# EAGLE board ESP8266-Thing-Dev_Panel_v10 (EAGLE 7.4.0), part 1 of 7
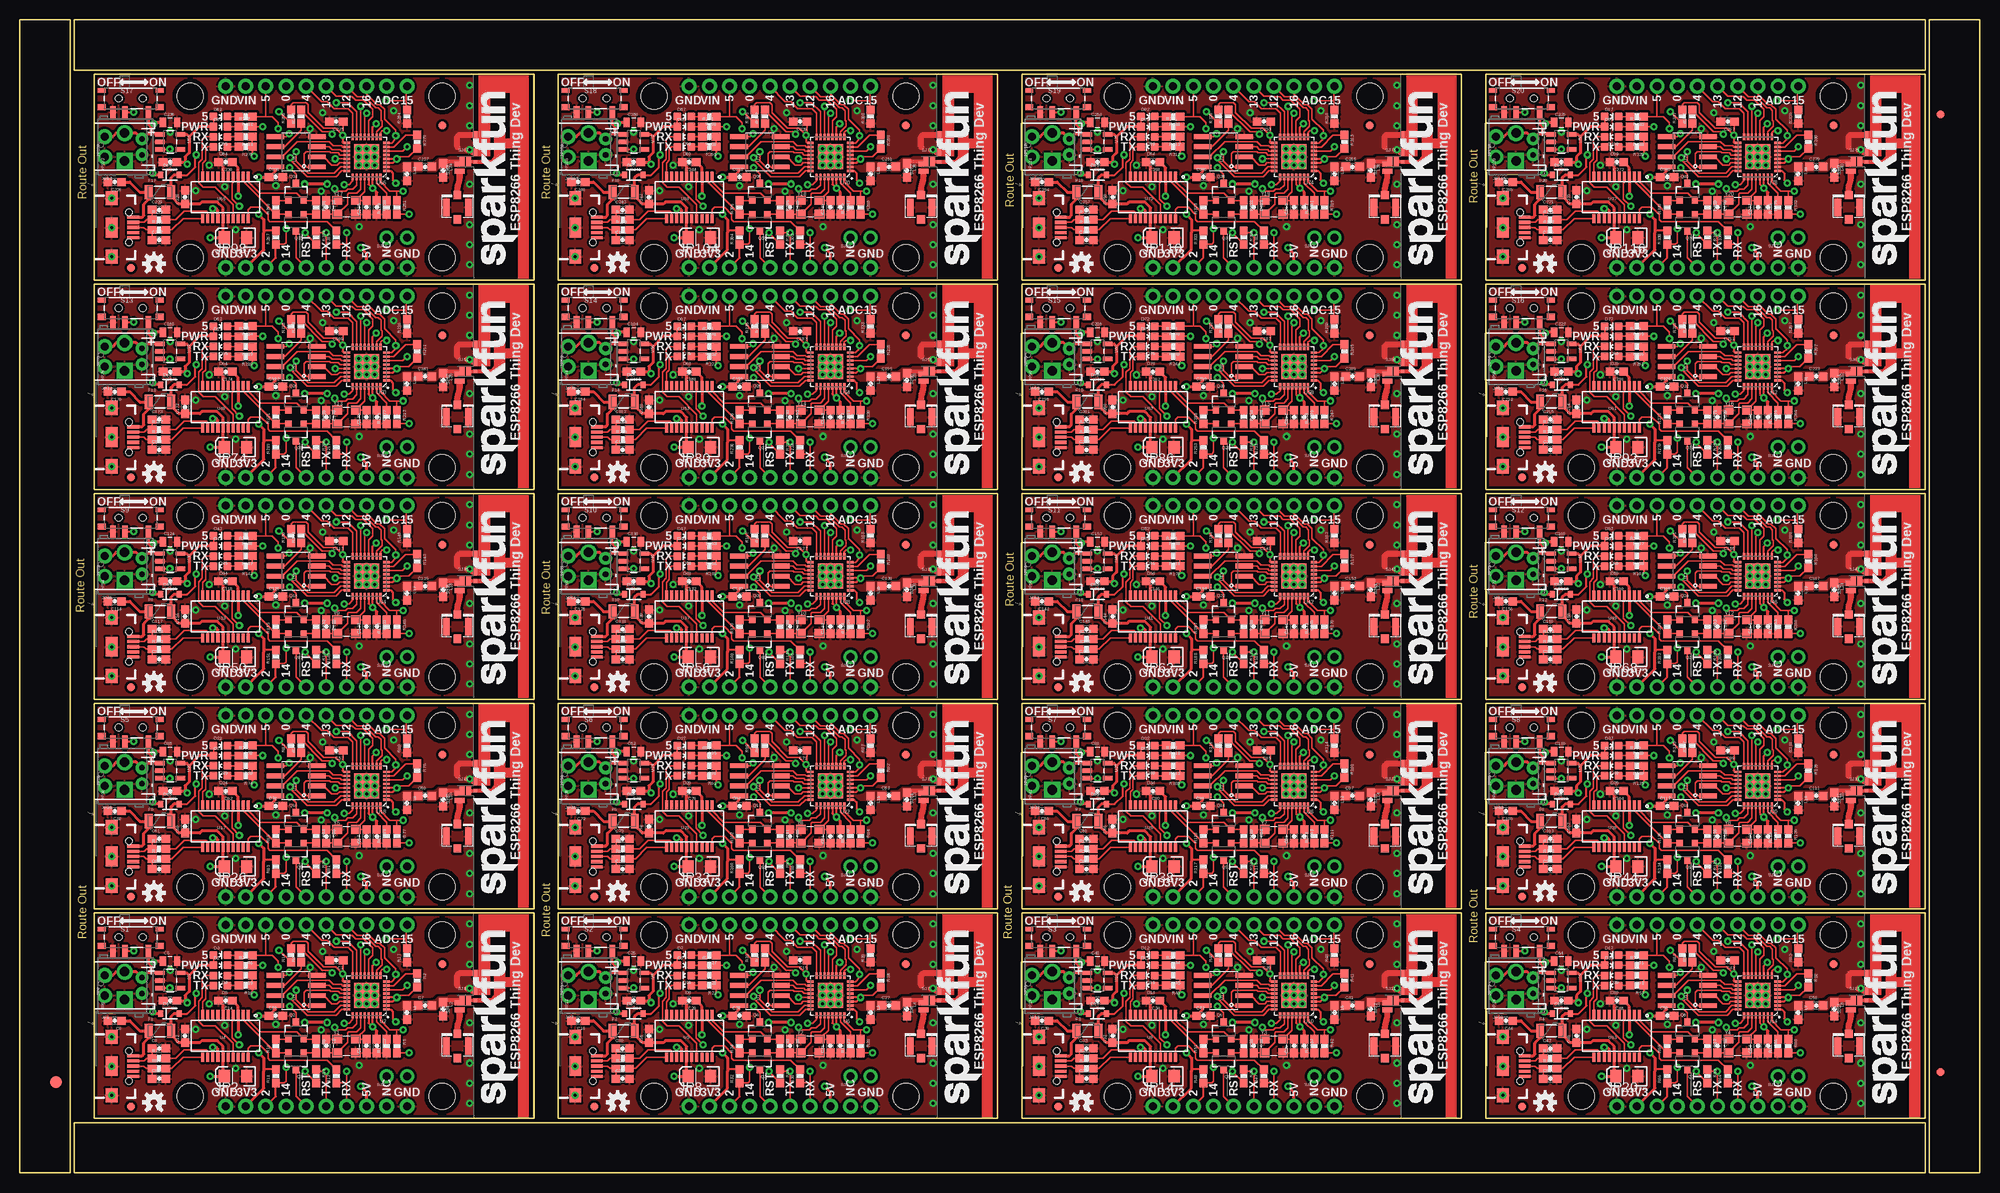
[diagram p0: board, top side]
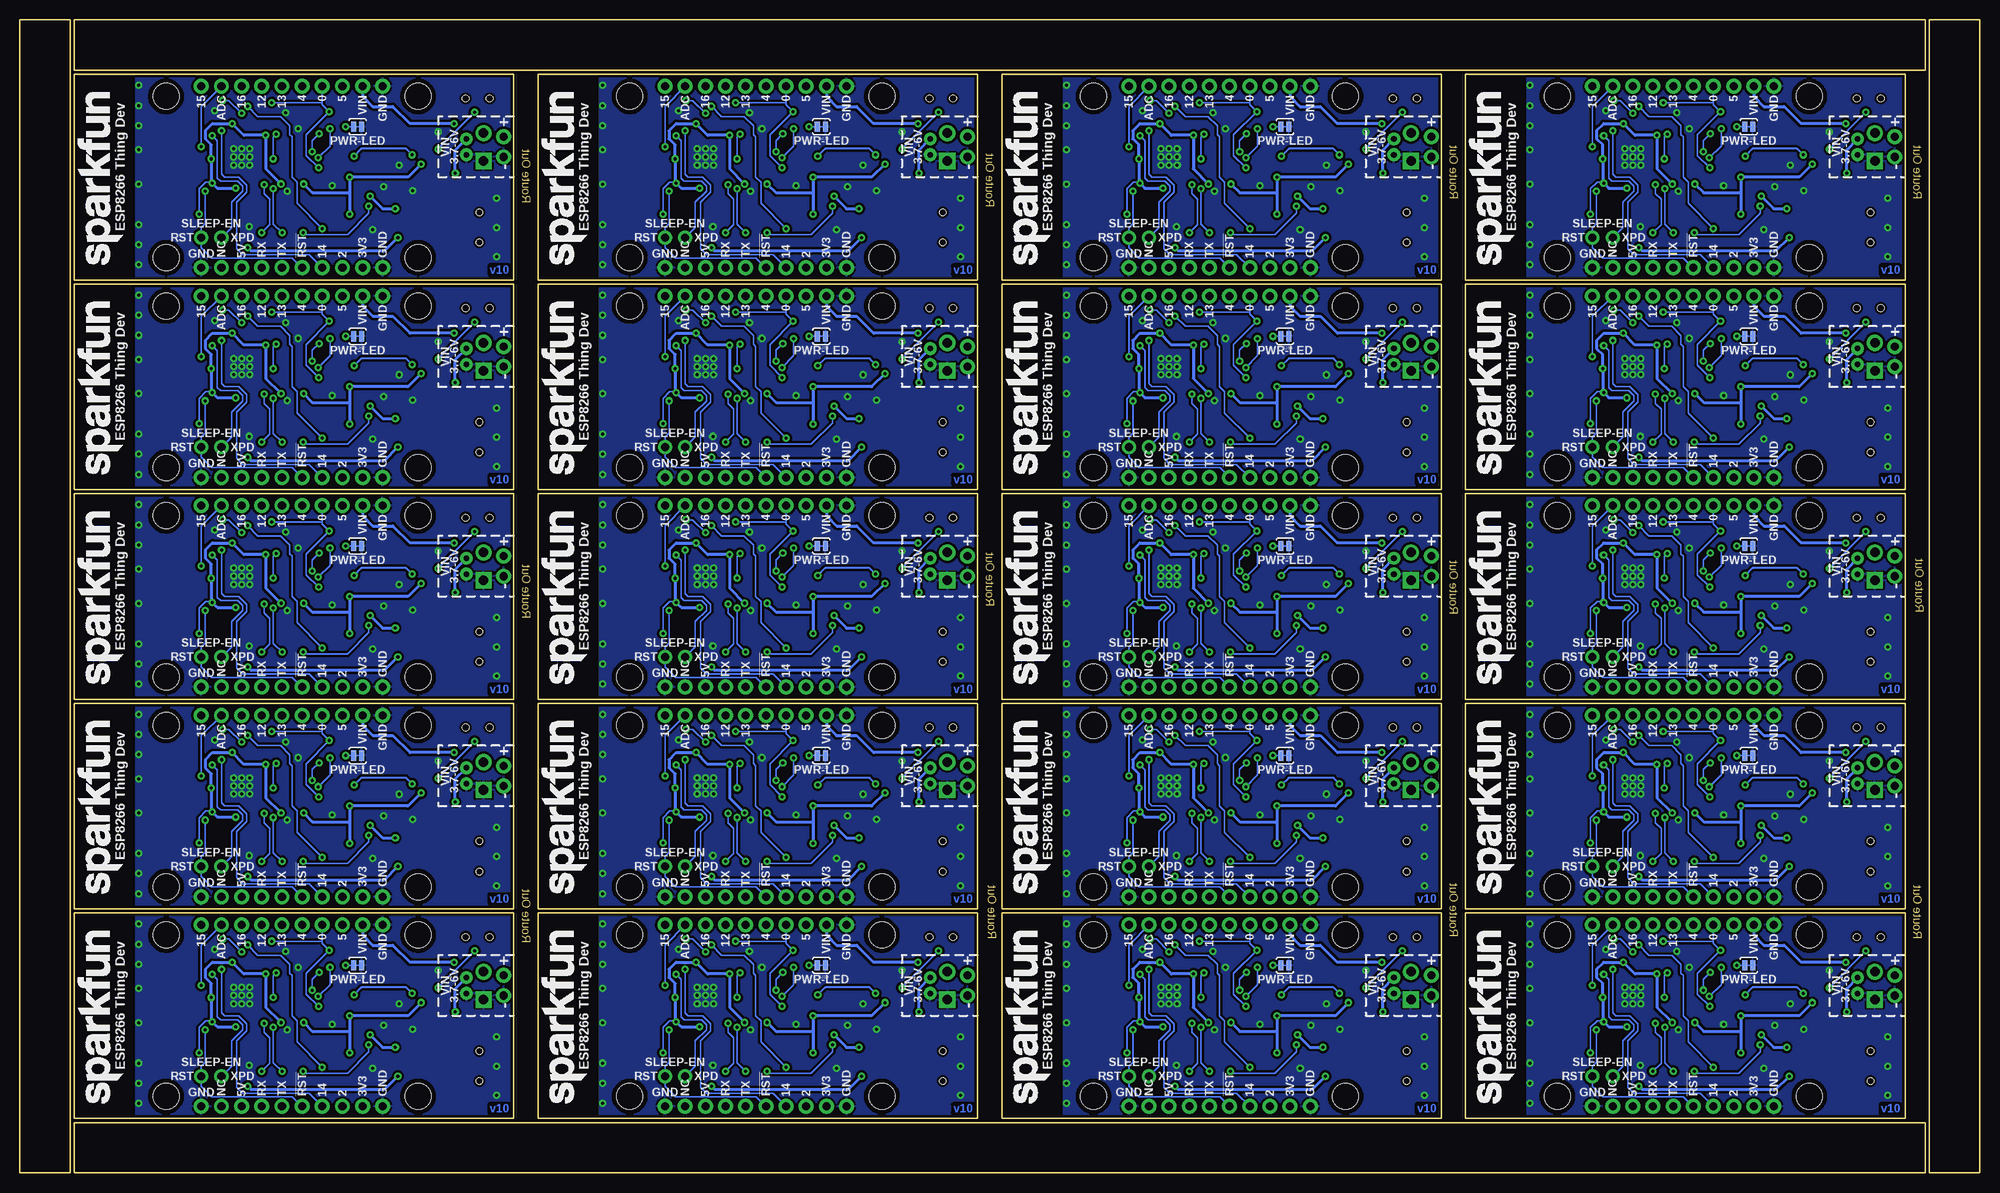
[diagram p1: board, bottom side, seen from below]

Size 246.89 x 145.29 mm. Coordinates in mm from the lower left corner, seen from the top.
Outline: 6.35,79.25 6.35,0 0,0 0,29.72
Outline: 0,27.18 0,145.29 6.35,145.29 6.35,76.71
Outline: 81.79,0 6.86,0 6.86,6.35 32.26,6.35
Outline: 29.72,6.35 240.03,6.35 240.03,0 79.25,0
Outline: 167.64,145.29 240.03,145.29 240.03,138.94 217.17,138.94
Outline: 219.71,138.94 6.86,138.94 6.86,145.29 170.18,145.29
Outline: 240.54,66.04 240.54,145.29 246.89,145.29 246.89,115.57
Outline: 246.89,118.11 246.89,0 240.54,0 240.54,68.58
Outline: 9.4,6.86 9.4,32.77 64.77,32.77 64.77,6.86 9.4,6.86
Outline: 67.82,6.86 67.82,32.77 123.19,32.77 123.19,6.86 67.82,6.86
Outline: 126.24,6.86 126.24,32.77 181.61,32.77 181.61,6.86 126.24,6.86
Outline: 184.66,6.86 184.66,32.77 240.03,32.77 240.03,6.86 184.66,6.86
Outline: 9.4,33.27 9.4,59.18 64.77,59.18 64.77,33.27 9.4,33.27
Outline: 67.82,33.27 67.82,59.18 123.19,59.18 123.19,33.27 67.82,33.27
Outline: 126.24,33.27 126.24,59.18 181.61,59.18 181.61,33.27 126.24,33.27
Outline: 184.66,33.27 184.66,59.18 240.03,59.18 240.03,33.27 184.66,33.27
Outline: 9.4,59.69 9.4,85.6 64.77,85.6 64.77,59.69 9.4,59.69
Outline: 67.82,59.69 67.82,85.6 123.19,85.6 123.19,59.69 67.82,59.69
Outline: 126.24,59.69 126.24,85.6 181.61,85.6 181.61,59.69 126.24,59.69
Outline: 184.66,59.69 184.66,85.6 240.03,85.6 240.03,59.69 184.66,59.69
Outline: 9.4,86.11 9.4,112.01 64.77,112.01 64.77,86.11 9.4,86.11
Outline: 67.82,86.11 67.82,112.01 123.19,112.01 123.19,86.11 67.82,86.11
Outline: 126.24,86.11 126.24,112.01 181.61,112.01 181.61,86.11 126.24,86.11
Outline: 184.66,86.11 184.66,112.01 240.03,112.01 240.03,86.11 184.66,86.11
Outline: 9.4,112.52 9.4,138.43 64.77,138.43 64.77,112.52 9.4,112.52
Outline: 67.82,112.52 67.82,138.43 123.19,138.43 123.19,112.52 67.82,112.52
Outline: 126.24,112.52 126.24,138.43 181.61,138.43 181.61,112.52 126.24,112.52
Outline: 184.66,112.52 184.66,138.43 240.03,138.43 240.03,112.52 184.66,112.52
Copper layers (1*16): Top 0.035mm / dielectric 1.5mm / Bottom 0.035mm
Design rules "SparkFun-2-layer": minimum track width 7mil, minimum drill 15mil, track to track 8mil, track to pad 8mil, pad to pad 8mil, via to via 8mil, smd to smd 8mil, copper to edge 8mil, drill to drill 8mil, minimum pad ring 12mil, minimum via ring 10mil, stop-mask expansion 4mil, vias tented up to drill 20mil, thermal gap 10mil

## Footprints (pad centres in the part's own frame; a part is rotated, then mirrored left to right if it is on the bottom)
0603-CAP = smd 1.1 x 1: 1 -0.85,0; 2 0.85,0
0805 = smd 0.8 x 1.2: 1 -0.9,0; 2 0.9,0
EIA3216 = smd 1.4 x 1.6: A 1.4,0; C -1.4,0
SOD-323 = smd 0.63 x 0.83: A 1.15,0; C -1.15,0
LED-0603 = smd 1 x 1: A 0,-0.877; C 0,0.877
TRACE_ANTENNA_2.4GHZ_25.7MM = smd 0.46 x 0.46: ANT 0,0.23 | smd 1 x 0.46: GND -1.18,0.23; GND2 -3.38,0.23
FIDUCIAL-1.5X3 = smd 1.5 x 1.5: 1 0,0
FIDUCIAL-1X2 = smd 1 x 1: 1 0,0
PTC-1206 = smd 1 x 1.8: 1 -1.4,0; 2 1.4,0
U.FL = smd 2.2 x 0.85: P$1 0,1.375; P$2 0,-1.375 | smd 1.05 x 1: P$3 1.525,0; P$4 -1.525,0
USB-B-MICRO-SMD_V03 = smd 1.45 x 0.4: D+1 2.725,0; D-1 2.725,0.65; GND1 2.725,-1.3; ID1 2.725,-0.65; VBUS1 2.725,1.3 | smd 1.5 x 1.8: SHIELD1 0,3.685; SHIELD2 0,-3.685 | smd 1.5 x 2.5: SHIELD3 0,0 | hole 0.85: 2.2,1.9; 2.2,-1.9
1X10_NO_SILK = drill 1.016 pad 1.88: 1 0,0; 2 2.54,0; 3 5.08,0; 4 7.62,0; 5 10.16,0; 6 12.7,0; 7 15.24,0; 8 17.78,0; 9 20.32,0; 10 22.86,0
JST-2-PTH = drill 0.7 pad 1.6: 1 -1,0; 2 1,0
1X02_NO_SILK = drill 1.016 pad 1.88: 1 0,0; 2 2.54,0
SCREWTERMINAL-3.5MM-2-NS = drill 1.2 pad 2.032 square: 1 0,0 | drill 1.2 pad 2.032: 2 3.5,0
0603 = smd 1.1 x 1: 1 -0.85,0; 2 0.85,0
SOT23-3 = smd 0.8 x 0.9: 1 -0.95,-1; 2 0.95,-1; 3 0,1.1
0603-RES = smd 1.1 x 1: 1 -0.85,0; 2 0.85,0
SWITCH-SPST-SMD-A = smd 0.7 x 1.5: 1 -2.25,-1.75; 2 -0.75,-1.75; 3 2.25,-1.75 | smd 1 x 0.6: GND1 -3.65,1; GND3 3.65,1 | smd 1 x 0.8: GND2 -3.65,-1.1; GND4 3.65,-1.1 | hole 0.9: -1.5,0; 1.5,0
PAD-JUMPER-2-NC_BY_TRACE_YES_SILK = smd 0.635 x 1.27: 1 -0.508,0; 2 0.508,0
PTH-JUMPER-2-NO_NO_SILK = drill 1.016 pad 1.778: 1 -1.27,0; 2 1.27,0
PAD-JUMPER-2-NC_BY_PASTE_NO_SILK = smd 0.635 x 1.27: 1 -0.401,0; 2 0.413,0
PAD-JUMPER-2-NO_NO_SILK = smd 0.635 x 1.27: 1 -0.45,0; 2 0.45,0
STAND-OFF = hole 3.302: 0,0
SOT23-5 = smd 0.55 x 1.2: 1 -0.95,-1.3; 2 0,-1.3; 3 0.95,-1.3; 4 0.95,1.3; 5 -0.95,1.3
QFN32 = smd 0.8 x 0.285: 1 -2.5,1.75; 2 -2.5,1.25; 3 -2.5,0.75; 4 -2.5,0.25; 5 -2.5,-0.25; 6 -2.5,-0.75; 7 -2.5,-1.25; 8 -2.5,-1.75; 17 2.5,-1.75; 18 2.5,-1.25; 19 2.5,-0.75; 20 2.5,-0.25; 21 2.5,0.25; 22 2.5,0.75; 23 2.5,1.25; 24 2.5,1.75 | smd 0.285 x 0.8: 9 -1.75,-2.5; 10 -1.25,-2.5; 11 -0.75,-2.5; 12 -0.25,-2.5; 13 0.25,-2.5; 14 0.75,-2.5; 15 1.25,-2.5; 16 1.75,-2.5; 25 1.75,2.5; 26 1.25,2.5; 27 0.75,2.5; 28 0.25,2.5; 29 -0.25,2.5; 30 -0.75,2.5; 31 -1.25,2.5; 32 -1.75,2.5 | smd 3.15 x 3.15: EP 0,0
SO08 = smd 0.61 x 2.21: 1 -1.905,-2.616; 2 -0.635,-2.616; 3 0.635,-2.616; 4 1.905,-2.616; 5 1.905,2.616; 6 0.635,2.616; 7 -0.635,2.616; 8 -1.905,2.616
SSOP20_L = smd 0.381 x 1.143: 1 -2.857,-2.68; 2 -2.223,-2.68; 3 -1.587,-2.68; 4 -0.953,-2.68; 5 -0.318,-2.68; 6 0.318,-2.68; 7 0.953,-2.68; 8 1.587,-2.68; 9 2.223,-2.68; 10 2.857,-2.68; 11 2.857,2.68; 12 2.223,2.68; 13 1.587,2.68; 14 0.953,2.68; 15 0.318,2.68; 16 -0.318,2.68; 17 -0.953,2.68; 18 -1.587,2.68; 19 -2.223,2.68; 20 -2.857,2.68
CRYSTAL-SMD-3.2X2.5 = smd 1.2 x 1.1: 1 -1.175,-0.875; 2 1.175,-0.875; 3 1.175,0.875; 4 -1.175,0.875

## Placement (x,y rotation side)
C1  10uF  [0603-CAP]  39.88,26.8 180 top
C2  0.1uF  [0603-CAP]  44.96,16 270 top
C3  10pF  [0603-CAP]  38.61,16 270 top
C4  10pF  [0603-CAP]  43.69,16 90 top
C5  1.0uF  [0805]  18.92,26.67 0 top
C6  2.2uF  [0603-CAP]  18.92,21.72 180 top
C7  5.6pF  [0603-CAP]  51.05,21.11 0 top
C8  0.1uF  [0603-CAP]  11.94,19.18 180 top
C9  47pF  [0603-CAP]  17.53,15.7 0 top
C10  0.1uF  [0603-CAP]  32.26,19.81 0 top
C11  47pF  [0603-CAP]  17.53,11.89 0 top
C12  0.1uF  [0603-CAP]  20.83,17.27 90 top
C13  10uF  [EIA3216]  27.18,12.19 180 top
C14  0.1uF  [0603-CAP]  25.91,21.72 180 top
C15  10uF  [0603-CAP]  98.3,26.8 180 top
C16  0.1uF  [0603-CAP]  70.36,19.18 180 top
C17  2.2uF  [0603-CAP]  77.34,21.72 180 top
C18  0.1uF  [0603-CAP]  79.25,17.27 90 top
C19  47pF  [0603-CAP]  75.95,15.7 0 top
C20  0.1uF  [0603-CAP]  84.33,21.72 180 top
C21  10uF  [EIA3216]  85.6,12.19 180 top
C22  47pF  [0603-CAP]  75.95,11.89 0 top
C23  0.1uF  [0603-CAP]  103.38,16 270 top
C24  10pF  [0603-CAP]  97.03,16 270 top
C25  10pF  [0603-CAP]  102.11,16 90 top
C26  1.0uF  [0805]  77.34,26.67 0 top
C27  5.6pF  [0603-CAP]  109.47,21.11 0 top
C28  0.1uF  [0603-CAP]  90.68,19.81 0 top
C29  10uF  [0603-CAP]  156.72,26.8 180 top
C30  0.1uF  [0603-CAP]  128.78,19.18 180 top
C31  2.2uF  [0603-CAP]  135.76,21.72 180 top
C32  0.1uF  [0603-CAP]  137.67,17.27 90 top
C33  47pF  [0603-CAP]  134.37,15.7 0 top
C34  0.1uF  [0603-CAP]  142.75,21.72 180 top
C35  10uF  [EIA3216]  144.02,12.19 180 top
C36  47pF  [0603-CAP]  134.37,11.89 0 top
C37  0.1uF  [0603-CAP]  161.8,16 270 top
C38  10pF  [0603-CAP]  155.45,16 270 top
C39  10pF  [0603-CAP]  160.53,16 90 top
C40  1.0uF  [0805]  135.76,26.67 0 top
C41  5.6pF  [0603-CAP]  167.89,21.11 0 top
C42  0.1uF  [0603-CAP]  149.1,19.81 0 top
C43  10uF  [0603-CAP]  215.14,26.8 180 top
C44  0.1uF  [0603-CAP]  187.2,19.18 180 top
C45  2.2uF  [0603-CAP]  194.18,21.72 180 top
C46  0.1uF  [0603-CAP]  196.09,17.27 90 top
C47  47pF  [0603-CAP]  192.79,15.7 0 top
C48  0.1uF  [0603-CAP]  201.17,21.72 180 top
C49  10uF  [EIA3216]  202.44,12.19 180 top
C50  47pF  [0603-CAP]  192.79,11.89 0 top
C51  0.1uF  [0603-CAP]  220.22,16 270 top
C52  10pF  [0603-CAP]  213.87,16 270 top
C53  10pF  [0603-CAP]  218.95,16 90 top
C54  1.0uF  [0805]  194.18,26.67 0 top
C55  5.6pF  [0603-CAP]  226.31,21.11 0 top
C56  0.1uF  [0603-CAP]  207.52,19.81 0 top
C57  10uF  [0603-CAP]  39.88,53.21 180 top
C58  0.1uF  [0603-CAP]  11.94,45.59 180 top
C59  2.2uF  [0603-CAP]  18.92,48.13 180 top
C60  0.1uF  [0603-CAP]  20.83,43.69 90 top
C61  47pF  [0603-CAP]  17.53,42.11 0 top
C62  0.1uF  [0603-CAP]  25.91,48.13 180 top
C63  10uF  [EIA3216]  27.18,38.61 180 top
C64  47pF  [0603-CAP]  17.53,38.3 0 top
C65  0.1uF  [0603-CAP]  44.96,42.42 270 top
C66  10pF  [0603-CAP]  38.61,42.42 270 top
C67  10pF  [0603-CAP]  43.69,42.42 90 top
C68  1.0uF  [0805]  18.92,53.09 0 top
C69  5.6pF  [0603-CAP]  51.05,47.52 0 top
C70  0.1uF  [0603-CAP]  32.26,46.23 0 top
C71  10uF  [0603-CAP]  98.3,53.21 180 top
C72  0.1uF  [0603-CAP]  70.36,45.59 180 top
C73  2.2uF  [0603-CAP]  77.34,48.13 180 top
C74  0.1uF  [0603-CAP]  79.25,43.69 90 top
C75  47pF  [0603-CAP]  75.95,42.11 0 top
C76  0.1uF  [0603-CAP]  84.33,48.13 180 top
C77  10uF  [EIA3216]  85.6,38.61 180 top
C78  47pF  [0603-CAP]  75.95,38.3 0 top
C79  0.1uF  [0603-CAP]  103.38,42.42 270 top
C80  10pF  [0603-CAP]  97.03,42.42 270 top
C81  10pF  [0603-CAP]  102.11,42.42 90 top
C82  1.0uF  [0805]  77.34,53.09 0 top
C83  5.6pF  [0603-CAP]  109.47,47.52 0 top
C84  0.1uF  [0603-CAP]  90.68,46.23 0 top
C85  10uF  [0603-CAP]  156.72,53.21 180 top
C86  0.1uF  [0603-CAP]  128.78,45.59 180 top
C87  2.2uF  [0603-CAP]  135.76,48.13 180 top
C88  0.1uF  [0603-CAP]  137.67,43.69 90 top
C89  47pF  [0603-CAP]  134.37,42.11 0 top
C90  0.1uF  [0603-CAP]  142.75,48.13 180 top
C91  10uF  [EIA3216]  144.02,38.61 180 top
C92  47pF  [0603-CAP]  134.37,38.3 0 top
C93  0.1uF  [0603-CAP]  161.8,42.42 270 top
C94  10pF  [0603-CAP]  155.45,42.42 270 top
C95  10pF  [0603-CAP]  160.53,42.42 90 top
C96  1.0uF  [0805]  135.76,53.09 0 top
C97  5.6pF  [0603-CAP]  167.89,47.52 0 top
C98  0.1uF  [0603-CAP]  149.1,46.23 0 top
C99  10uF  [0603-CAP]  215.14,53.21 180 top
C100  0.1uF  [0603-CAP]  187.2,45.59 180 top
C101  2.2uF  [0603-CAP]  194.18,48.13 180 top
C102  0.1uF  [0603-CAP]  196.09,43.69 90 top
C103  47pF  [0603-CAP]  192.79,42.11 0 top
C104  0.1uF  [0603-CAP]  201.17,48.13 180 top
C105  10uF  [EIA3216]  202.44,38.61 180 top
C106  47pF  [0603-CAP]  192.79,38.3 0 top
C107  0.1uF  [0603-CAP]  220.22,42.42 270 top
C108  10pF  [0603-CAP]  213.87,42.42 270 top
C109  10pF  [0603-CAP]  218.95,42.42 90 top
C110  1.0uF  [0805]  194.18,53.09 0 top
C111  5.6pF  [0603-CAP]  226.31,47.52 0 top
C112  0.1uF  [0603-CAP]  207.52,46.23 0 top
C113  10uF  [0603-CAP]  39.88,79.63 180 top
C114  0.1uF  [0603-CAP]  11.94,72.01 180 top
C115  2.2uF  [0603-CAP]  18.92,74.55 180 top
C116  0.1uF  [0603-CAP]  20.83,70.1 90 top
C117  47pF  [0603-CAP]  17.53,68.53 0 top
C118  0.1uF  [0603-CAP]  25.91,74.55 180 top
C119  10uF  [EIA3216]  27.18,65.02 180 top
C120  47pF  [0603-CAP]  17.53,64.72 0 top
C121  0.1uF  [0603-CAP]  44.96,68.83 270 top
C122  10pF  [0603-CAP]  38.61,68.83 270 top
C123  10pF  [0603-CAP]  43.69,68.83 90 top
C124  1.0uF  [0805]  18.92,79.5 0 top
C125  5.6pF  [0603-CAP]  51.05,73.94 0 top
C126  0.1uF  [0603-CAP]  32.26,72.64 0 top
C127  10uF  [0603-CAP]  98.3,79.63 180 top
C128  0.1uF  [0603-CAP]  70.36,72.01 180 top
C129  2.2uF  [0603-CAP]  77.34,74.55 180 top
C130  0.1uF  [0603-CAP]  79.25,70.1 90 top
C131  47pF  [0603-CAP]  75.95,68.53 0 top
C132  0.1uF  [0603-CAP]  84.33,74.55 180 top
C133  10uF  [EIA3216]  85.6,65.02 180 top
C134  47pF  [0603-CAP]  75.95,64.72 0 top
C135  0.1uF  [0603-CAP]  103.38,68.83 270 top
C136  10pF  [0603-CAP]  97.03,68.83 270 top
C137  10pF  [0603-CAP]  102.11,68.83 90 top
C138  1.0uF  [0805]  77.34,79.5 0 top
C139  5.6pF  [0603-CAP]  109.47,73.94 0 top
C140  0.1uF  [0603-CAP]  90.68,72.64 0 top
C141  10uF  [0603-CAP]  156.72,79.63 180 top
C142  0.1uF  [0603-CAP]  128.78,72.01 180 top
C143  2.2uF  [0603-CAP]  135.76,74.55 180 top
C144  0.1uF  [0603-CAP]  137.67,70.1 90 top
C145  47pF  [0603-CAP]  134.37,68.53 0 top
C146  0.1uF  [0603-CAP]  142.75,74.55 180 top
C147  10uF  [EIA3216]  144.02,65.02 180 top
C148  47pF  [0603-CAP]  134.37,64.72 0 top
C149  0.1uF  [0603-CAP]  161.8,68.83 270 top
C150  10pF  [0603-CAP]  155.45,68.83 270 top
C151  10pF  [0603-CAP]  160.53,68.83 90 top
C152  1.0uF  [0805]  135.76,79.5 0 top
C153  5.6pF  [0603-CAP]  167.89,73.94 0 top
C154  0.1uF  [0603-CAP]  149.1,72.64 0 top
C155  10uF  [0603-CAP]  215.14,79.63 180 top
C156  0.1uF  [0603-CAP]  187.2,72.01 180 top
C157  2.2uF  [0603-CAP]  194.18,74.55 180 top
C158  0.1uF  [0603-CAP]  196.09,70.1 90 top
C159  47pF  [0603-CAP]  192.79,68.53 0 top
C160  0.1uF  [0603-CAP]  201.17,74.55 180 top
C161  10uF  [EIA3216]  202.44,65.02 180 top
C162  47pF  [0603-CAP]  192.79,64.72 0 top
C163  0.1uF  [0603-CAP]  220.22,68.83 270 top
C164  10pF  [0603-CAP]  213.87,68.83 270 top
C165  10pF  [0603-CAP]  218.95,68.83 90 top
C166  1.0uF  [0805]  194.18,79.5 0 top
C167  5.6pF  [0603-CAP]  226.31,73.94 0 top
C168  0.1uF  [0603-CAP]  207.52,72.64 0 top
C169  10uF  [0603-CAP]  39.88,106.05 180 top
C170  0.1uF  [0603-CAP]  11.94,98.42 180 top
C171  2.2uF  [0603-CAP]  18.92,100.97 180 top
C172  0.1uF  [0603-CAP]  20.83,96.52 90 top
C173  47pF  [0603-CAP]  17.53,94.95 0 top
C174  0.1uF  [0603-CAP]  25.91,100.97 180 top
C175  10uF  [EIA3216]  27.18,91.44 180 top
C176  47pF  [0603-CAP]  17.53,91.14 0 top
C177  0.1uF  [0603-CAP]  44.96,95.25 270 top
C178  10pF  [0603-CAP]  38.61,95.25 270 top
C179  10pF  [0603-CAP]  43.69,95.25 90 top
C180  1.0uF  [0805]  18.92,105.92 0 top
C181  5.6pF  [0603-CAP]  51.05,100.35 0 top
C182  0.1uF  [0603-CAP]  32.26,99.06 0 top
C183  10uF  [0603-CAP]  98.3,106.05 180 top
C184  0.1uF  [0603-CAP]  70.36,98.42 180 top
C185  2.2uF  [0603-CAP]  77.34,100.97 180 top
C186  0.1uF  [0603-CAP]  79.25,96.52 90 top
C187  47pF  [0603-CAP]  75.95,94.95 0 top
C188  0.1uF  [0603-CAP]  84.33,100.97 180 top
C189  10uF  [EIA3216]  85.6,91.44 180 top
C190  47pF  [0603-CAP]  75.95,91.14 0 top
C191  0.1uF  [0603-CAP]  103.38,95.25 270 top
C192  10pF  [0603-CAP]  97.03,95.25 270 top
C193  10pF  [0603-CAP]  102.11,95.25 90 top
C194  1.0uF  [0805]  77.34,105.92 0 top
C195  5.6pF  [0603-CAP]  109.47,100.35 0 top
C196  0.1uF  [0603-CAP]  90.68,99.06 0 top
C197  10uF  [0603-CAP]  156.72,106.05 180 top
C198  0.1uF  [0603-CAP]  128.78,98.42 180 top
C199  2.2uF  [0603-CAP]  135.76,100.97 180 top
C200  0.1uF  [0603-CAP]  137.67,96.52 90 top
C201  47pF  [0603-CAP]  134.37,94.95 0 top
C202  0.1uF  [0603-CAP]  142.75,100.97 180 top
C203  10uF  [EIA3216]  144.02,91.44 180 top
C204  47pF  [0603-CAP]  134.37,91.14 0 top
C205  0.1uF  [0603-CAP]  161.8,95.25 270 top
C206  10pF  [0603-CAP]  155.45,95.25 270 top
C207  10pF  [0603-CAP]  160.53,95.25 90 top
C208  1.0uF  [0805]  135.76,105.92 0 top
C209  5.6pF  [0603-CAP]  167.89,100.35 0 top
C210  0.1uF  [0603-CAP]  149.1,99.06 0 top
C211  10uF  [0603-CAP]  215.14,106.05 180 top
C212  0.1uF  [0603-CAP]  187.2,98.42 180 top
C213  2.2uF  [0603-CAP]  194.18,100.97 180 top
C214  0.1uF  [0603-CAP]  196.09,96.52 90 top
C215  47pF  [0603-CAP]  192.79,94.95 0 top
C216  0.1uF  [0603-CAP]  201.17,100.97 180 top
C217  10uF  [EIA3216]  202.44,91.44 180 top
C218  47pF  [0603-CAP]  192.79,91.14 0 top
C219  0.1uF  [0603-CAP]  220.22,95.25 270 top
C220  10pF  [0603-CAP]  213.87,95.25 270 top
C221  10pF  [0603-CAP]  218.95,95.25 90 top
C222  1.0uF  [0805]  194.18,105.92 0 top
C223  5.6pF  [0603-CAP]  226.31,100.35 0 top
C224  0.1uF  [0603-CAP]  207.52,99.06 0 top
C225  10uF  [0603-CAP]  39.88,132.46 180 top
C226  0.1uF  [0603-CAP]  11.94,124.84 180 top
C227  2.2uF  [0603-CAP]  18.92,127.38 180 top
C228  0.1uF  [0603-CAP]  20.83,122.94 90 top
C229  47pF  [0603-CAP]  17.53,121.36 0 top
C230  0.1uF  [0603-CAP]  25.91,127.38 180 top
C231  10uF  [EIA3216]  27.18,117.86 180 top
C232  47pF  [0603-CAP]  17.53,117.55 0 top
C233  0.1uF  [0603-CAP]  44.96,121.67 270 top
C234  10pF  [0603-CAP]  38.61,121.67 270 top
C235  10pF  [0603-CAP]  43.69,121.67 90 top
C236  1.0uF  [0805]  18.92,132.33 0 top
C237  5.6pF  [0603-CAP]  51.05,126.77 0 top
C238  0.1uF  [0603-CAP]  32.26,125.48 0 top
C239  10uF  [0603-CAP]  98.3,132.46 180 top
C240  0.1uF  [0603-CAP]  70.36,124.84 180 top
C241  2.2uF  [0603-CAP]  77.34,127.38 180 top
C242  0.1uF  [0603-CAP]  79.25,122.94 90 top
C243  47pF  [0603-CAP]  75.95,121.36 0 top
C244  0.1uF  [0603-CAP]  84.33,127.38 180 top
C245  10uF  [EIA3216]  85.6,117.86 180 top
C246  47pF  [0603-CAP]  75.95,117.55 0 top
C247  0.1uF  [0603-CAP]  103.38,121.67 270 top
C248  10pF  [0603-CAP]  97.03,121.67 270 top
C249  10pF  [0603-CAP]  102.11,121.67 90 top
C250  1.0uF  [0805]  77.34,132.33 0 top
C251  5.6pF  [0603-CAP]  109.47,126.77 0 top
C252  0.1uF  [0603-CAP]  90.68,125.48 0 top
C253  10uF  [0603-CAP]  156.72,132.46 180 top
C254  0.1uF  [0603-CAP]  128.78,124.84 180 top
C255  2.2uF  [0603-CAP]  135.76,127.38 180 top
C256  0.1uF  [0603-CAP]  137.67,122.94 90 top
C257  47pF  [0603-CAP]  134.37,121.36 0 top
C258  0.1uF  [0603-CAP]  142.75,127.38 180 top
C259  10uF  [EIA3216]  144.02,117.86 180 top
C260  47pF  [0603-CAP]  134.37,117.55 0 top
C261  0.1uF  [0603-CAP]  161.8,121.67 270 top
C262  10pF  [0603-CAP]  155.45,121.67 270 top
C263  10pF  [0603-CAP]  160.53,121.67 90 top
C264  1.0uF  [0805]  135.76,132.33 0 top
C265  5.6pF  [0603-CAP]  167.89,126.77 0 top
C266  0.1uF  [0603-CAP]  149.1,125.48 0 top
C267  10uF  [0603-CAP]  215.14,132.46 180 top
C268  0.1uF  [0603-CAP]  187.2,124.84 180 top
C269  2.2uF  [0603-CAP]  194.18,127.38 180 top
C270  0.1uF  [0603-CAP]  196.09,122.94 90 top
C271  47pF  [0603-CAP]  192.79,121.36 0 top
C272  0.1uF  [0603-CAP]  201.17,127.38 180 top
C273  10uF  [EIA3216]  202.44,117.86 180 top
C274  47pF  [0603-CAP]  192.79,117.55 0 top
C275  0.1uF  [0603-CAP]  220.22,121.67 270 top
C276  10pF  [0603-CAP]  213.87,121.67 270 top
C277  10pF  [0603-CAP]  218.95,121.67 90 top
C278  1.0uF  [0805]  194.18,132.33 0 top
C279  5.6pF  [0603-CAP]  226.31,126.77 0 top
C280  0.1uF  [0603-CAP]  207.52,125.48 0 top
D1  BAT20J  [SOD-323]  18.92,20.07 0 top
D2  RED  [LED-0603]  25.27,26.16 270 top
D3  BLUE  [LED-0603]  25.27,27.43 270 top
D4  Yellow  [LED-0603]  25.27,24.89 90 top
D5  GREEN  [LED-0603]  25.27,23.62 90 top
D6  RED  [LED-0603]  83.69,26.16 270 top
D7  BLUE  [LED-0603]  83.69,27.43 270 top
D8  BAT20J  [SOD-323]  77.34,20.07 0 top
D9  GREEN  [LED-0603]  83.69,23.62 90 top
D10  Yellow  [LED-0603]  83.69,24.89 90 top
D11  RED  [LED-0603]  142.11,26.16 270 top
D12  BLUE  [LED-0603]  142.11,27.43 270 top
D13  BAT20J  [SOD-323]  135.76,20.07 0 top
D14  GREEN  [LED-0603]  142.11,23.62 90 top
D15  Yellow  [LED-0603]  142.11,24.89 90 top
D16  RED  [LED-0603]  200.53,26.16 270 top
D17  BLUE  [LED-0603]  200.53,27.43 270 top
D18  BAT20J  [SOD-323]  194.18,20.07 0 top
D19  GREEN  [LED-0603]  200.53,23.62 90 top
D20  Yellow  [LED-0603]  200.53,24.89 90 top
D21  RED  [LED-0603]  25.27,52.58 270 top
D22  BLUE  [LED-0603]  25.27,53.85 270 top
D23  BAT20J  [SOD-323]  18.92,46.48 0 top
D24  GREEN  [LED-0603]  25.27,50.04 90 top
D25  Yellow  [LED-0603]  25.27,51.31 90 top
D26  RED  [LED-0603]  83.69,52.58 270 top
D27  BLUE  [LED-0603]  83.69,53.85 270 top
D28  BAT20J  [SOD-323]  77.34,46.48 0 top
D29  GREEN  [LED-0603]  83.69,50.04 90 top
D30  Yellow  [LED-0603]  83.69,51.31 90 top
D31  RED  [LED-0603]  142.11,52.58 270 top
D32  BLUE  [LED-0603]  142.11,53.85 270 top
D33  BAT20J  [SOD-323]  135.76,46.48 0 top
D34  GREEN  [LED-0603]  142.11,50.04 90 top
D35  Yellow  [LED-0603]  142.11,51.31 90 top
D36  RED  [LED-0603]  200.53,52.58 270 top
D37  BLUE  [LED-0603]  200.53,53.85 270 top
D38  BAT20J  [SOD-323]  194.18,46.48 0 top
D39  GREEN  [LED-0603]  200.53,50.04 90 top
D40  Yellow  [LED-0603]  200.53,51.31 90 top
D41  RED  [LED-0603]  25.27,78.99 270 top
D42  BLUE  [LED-0603]  25.27,80.26 270 top
D43  BAT20J  [SOD-323]  18.92,72.9 0 top
D44  GREEN  [LED-0603]  25.27,76.45 90 top
D45  Yellow  [LED-0603]  25.27,77.72 90 top
D46  RED  [LED-0603]  83.69,78.99 270 top
D47  BLUE  [LED-0603]  83.69,80.26 270 top
D48  BAT20J  [SOD-323]  77.34,72.9 0 top
D49  GREEN  [LED-0603]  83.69,76.45 90 top
D50  Yellow  [LED-0603]  83.69,77.72 90 top
D51  RED  [LED-0603]  142.11,78.99 270 top
D52  BLUE  [LED-0603]  142.11,80.26 270 top
D53  BAT20J  [SOD-323]  135.76,72.9 0 top
D54  GREEN  [LED-0603]  142.11,76.45 90 top
D55  Yellow  [LED-0603]  142.11,77.72 90 top
D56  RED  [LED-0603]  200.53,78.99 270 top
D57  BLUE  [LED-0603]  200.53,80.26 270 top
D58  BAT20J  [SOD-323]  194.18,72.9 0 top
D59  GREEN  [LED-0603]  200.53,76.45 90 top
D60  Yellow  [LED-0603]  200.53,77.72 90 top
D61  RED  [LED-0603]  25.27,105.41 270 top
D62  BLUE  [LED-0603]  25.27,106.68 270 top
D63  BAT20J  [SOD-323]  18.92,99.31 0 top
D64  GREEN  [LED-0603]  25.27,102.87 90 top
D65  Yellow  [LED-0603]  25.27,104.14 90 top
D66  RED  [LED-0603]  83.69,105.41 270 top
D67  BLUE  [LED-0603]  83.69,106.68 270 top
D68  BAT20J  [SOD-323]  77.34,99.31 0 top
D69  GREEN  [LED-0603]  83.69,102.87 90 top
D70  Yellow  [LED-0603]  83.69,104.14 90 top
D71  RED  [LED-0603]  142.11,105.41 270 top
D72  BLUE  [LED-0603]  142.11,106.68 270 top
D73  BAT20J  [SOD-323]  135.76,99.31 0 top
D74  GREEN  [LED-0603]  142.11,102.87 90 top
D75  Yellow  [LED-0603]  142.11,104.14 90 top
D76  RED  [LED-0603]  200.53,105.41 270 top
D77  BLUE  [LED-0603]  200.53,106.68 270 top
D78  BAT20J  [SOD-323]  194.18,99.31 0 top
D79  GREEN  [LED-0603]  200.53,102.87 90 top
D80  Yellow  [LED-0603]  200.53,104.14 90 top
D81  RED  [LED-0603]  25.27,131.83 270 top
D82  BLUE  [LED-0603]  25.27,133.1 270 top
D83  BAT20J  [SOD-323]  18.92,125.73 0 top
D84  GREEN  [LED-0603]  25.27,129.29 90 top
D85  Yellow  [LED-0603]  25.27,130.56 90 top
D86  RED  [LED-0603]  83.69,131.83 270 top
D87  BLUE  [LED-0603]  83.69,133.1 270 top
D88  BAT20J  [SOD-323]  77.34,125.73 0 top
D89  GREEN  [LED-0603]  83.69,129.29 90 top
D90  Yellow  [LED-0603]  83.69,130.56 90 top
D91  RED  [LED-0603]  142.11,131.83 270 top
D92  BLUE  [LED-0603]  142.11,133.1 270 top
D93  BAT20J  [SOD-323]  135.76,125.73 0 top
D94  GREEN  [LED-0603]  142.11,129.29 90 top
D95  Yellow  [LED-0603]  142.11,130.56 90 top
D96  RED  [LED-0603]  200.53,131.83 270 top
D97  BLUE  [LED-0603]  200.53,133.1 270 top
D98  BAT20J  [SOD-323]  194.18,125.73 0 top
D99  GREEN  [LED-0603]  200.53,129.29 90 top
D100  Yellow  [LED-0603]  200.53,130.56 90 top
E1  ANTENNATRACE  [TRACE_ANTENNA_2.4GHZ_25.7MM]  57.15,21.74 270 top
E2  ANTENNATRACE  [TRACE_ANTENNA_2.4GHZ_25.7MM]  115.57,21.74 270 top
E3  ANTENNATRACE  [TRACE_ANTENNA_2.4GHZ_25.7MM]  173.99,21.74 270 top
E4  ANTENNATRACE  [TRACE_ANTENNA_2.4GHZ_25.7MM]  232.41,21.74 270 top
E5  ANTENNATRACE  [TRACE_ANTENNA_2.4GHZ_25.7MM]  57.15,48.16 270 top
E6  ANTENNATRACE  [TRACE_ANTENNA_2.4GHZ_25.7MM]  115.57,48.16 270 top
E7  ANTENNATRACE  [TRACE_ANTENNA_2.4GHZ_25.7MM]  173.99,48.16 270 top
E8  ANTENNATRACE  [TRACE_ANTENNA_2.4GHZ_25.7MM]  232.41,48.16 270 top
E9  ANTENNATRACE  [TRACE_ANTENNA_2.4GHZ_25.7MM]  57.15,74.57 270 top
E10  ANTENNATRACE  [TRACE_ANTENNA_2.4GHZ_25.7MM]  115.57,74.57 270 top
E11  ANTENNATRACE  [TRACE_ANTENNA_2.4GHZ_25.7MM]  173.99,74.57 270 top
E12  ANTENNATRACE  [TRACE_ANTENNA_2.4GHZ_25.7MM]  232.41,74.57 270 top
E13  ANTENNATRACE  [TRACE_ANTENNA_2.4GHZ_25.7MM]  57.15,100.99 270 top
E14  ANTENNATRACE  [TRACE_ANTENNA_2.4GHZ_25.7MM]  115.57,100.99 270 top
E15  ANTENNATRACE  [TRACE_ANTENNA_2.4GHZ_25.7MM]  173.99,100.99 270 top
E16  ANTENNATRACE  [TRACE_ANTENNA_2.4GHZ_25.7MM]  232.41,100.99 270 top
E17  ANTENNATRACE  [TRACE_ANTENNA_2.4GHZ_25.7MM]  57.15,127.41 270 top
E18  ANTENNATRACE  [TRACE_ANTENNA_2.4GHZ_25.7MM]  115.57,127.41 270 top
E19  ANTENNATRACE  [TRACE_ANTENNA_2.4GHZ_25.7MM]  173.99,127.41 270 top
E20  ANTENNATRACE  [TRACE_ANTENNA_2.4GHZ_25.7MM]  232.41,127.41 270 top
E$1  [FIDUCIAL-1.5X3]  4.57,11.43 0 top
E$7  [FIDUCIAL-1X2]  241.94,133.35 180 top
E$8  [FIDUCIAL-1X2]  241.94,12.7 0 top
F1  500mA  [PTC-1206]  17.65,17.91 0 top
F2  500mA  [PTC-1206]  76.07,17.91 0 top
F3  500mA  [PTC-1206]  134.49,17.91 0 top
F4  500mA  [PTC-1206]  192.91,17.91 0 top
F5  500mA  [PTC-1206]  17.65,44.32 0 top
F6  500mA  [PTC-1206]  76.07,44.32 0 top
F7  500mA  [PTC-1206]  134.49,44.32 0 top
F8  500mA  [PTC-1206]  192.91,44.32 0 top
F9  500mA  [PTC-1206]  17.65,70.74 0 top
F10  500mA  [PTC-1206]  76.07,70.74 0 top
F11  500mA  [PTC-1206]  134.49,70.74 0 top
F12  500mA  [PTC-1206]  192.91,70.74 0 top
F13  500mA  [PTC-1206]  17.65,97.16 0 top
F14  500mA  [PTC-1206]  76.07,97.16 0 top
F15  500mA  [PTC-1206]  134.49,97.16 0 top
F16  500mA  [PTC-1206]  192.91,97.16 0 top
F17  500mA  [PTC-1206]  17.65,123.57 0 top
F18  500mA  [PTC-1206]  76.07,123.57 0 top
F19  500mA  [PTC-1206]  134.49,123.57 0 top
F20  500mA  [PTC-1206]  192.91,123.57 0 top
FID1  FIDUCIAL1X2  [FIDUCIAL-1X2]  53.21,26.29 0 top
FID2  FIDUCIAL1X2  [FIDUCIAL-1X2]  13.97,8.38 0 top
FID3  FIDUCIAL1X2  [FIDUCIAL-1X2]  72.39,8.38 0 top
FID4  FIDUCIAL1X2  [FIDUCIAL-1X2]  111.63,26.29 0 top
FID5  FIDUCIAL1X2  [FIDUCIAL-1X2]  130.81,8.38 0 top
FID6  FIDUCIAL1X2  [FIDUCIAL-1X2]  170.05,26.29 0 top
FID7  FIDUCIAL1X2  [FIDUCIAL-1X2]  189.23,8.38 0 top
FID8  FIDUCIAL1X2  [FIDUCIAL-1X2]  228.47,26.29 0 top
FID9  FIDUCIAL1X2  [FIDUCIAL-1X2]  13.97,34.8 0 top
FID10  FIDUCIAL1X2  [FIDUCIAL-1X2]  53.21,52.7 0 top
FID11  FIDUCIAL1X2  [FIDUCIAL-1X2]  72.39,34.8 0 top
FID12  FIDUCIAL1X2  [FIDUCIAL-1X2]  111.63,52.7 0 top
FID13  FIDUCIAL1X2  [FIDUCIAL-1X2]  130.81,34.8 0 top
FID14  FIDUCIAL1X2  [FIDUCIAL-1X2]  170.05,52.7 0 top
FID15  FIDUCIAL1X2  [FIDUCIAL-1X2]  189.23,34.8 0 top
FID16  FIDUCIAL1X2  [FIDUCIAL-1X2]  228.47,52.7 0 top
FID17  FIDUCIAL1X2  [FIDUCIAL-1X2]  13.97,61.21 0 top
FID18  FIDUCIAL1X2  [FIDUCIAL-1X2]  53.21,79.12 0 top
FID19  FIDUCIAL1X2  [FIDUCIAL-1X2]  72.39,61.21 0 top
FID20  FIDUCIAL1X2  [FIDUCIAL-1X2]  111.63,79.12 0 top
FID21  FIDUCIAL1X2  [FIDUCIAL-1X2]  130.81,61.21 0 top
FID22  FIDUCIAL1X2  [FIDUCIAL-1X2]  170.05,79.12 0 top
FID23  FIDUCIAL1X2  [FIDUCIAL-1X2]  189.23,61.21 0 top
FID24  FIDUCIAL1X2  [FIDUCIAL-1X2]  228.47,79.12 0 top
FID25  FIDUCIAL1X2  [FIDUCIAL-1X2]  13.97,87.63 0 top
FID26  FIDUCIAL1X2  [FIDUCIAL-1X2]  53.21,105.54 0 top
FID27  FIDUCIAL1X2  [FIDUCIAL-1X2]  72.39,87.63 0 top
FID28  FIDUCIAL1X2  [FIDUCIAL-1X2]  111.63,105.54 0 top
FID29  FIDUCIAL1X2  [FIDUCIAL-1X2]  130.81,87.63 0 top
FID30  FIDUCIAL1X2  [FIDUCIAL-1X2]  170.05,105.54 0 top
FID31  FIDUCIAL1X2  [FIDUCIAL-1X2]  189.23,87.63 0 top
FID32  FIDUCIAL1X2  [FIDUCIAL-1X2]  228.47,105.54 0 top
FID33  FIDUCIAL1X2  [FIDUCIAL-1X2]  13.97,114.05 0 top
FID34  FIDUCIAL1X2  [FIDUCIAL-1X2]  53.21,131.95 0 top
FID35  FIDUCIAL1X2  [FIDUCIAL-1X2]  72.39,114.05 0 top
FID36  FIDUCIAL1X2  [FIDUCIAL-1X2]  111.63,131.95 0 top
FID37  FIDUCIAL1X2  [FIDUCIAL-1X2]  130.81,114.05 0 top
FID38  FIDUCIAL1X2  [FIDUCIAL-1X2]  170.05,131.95 0 top
FID39  FIDUCIAL1X2  [FIDUCIAL-1X2]  189.23,114.05 0 top
FID40  FIDUCIAL1X2  [FIDUCIAL-1X2]  228.47,131.95 0 top
J1  DNP  [U.FL]  55.12,16 90 top
J2  DNP  [U.FL]  113.54,16 90 top
J3  DNP  [U.FL]  171.96,16 90 top
J4  DNP  [U.FL]  230.38,16 90 top
J5  DNP  [U.FL]  55.12,42.42 90 top
J6  DNP  [U.FL]  113.54,42.42 90 top
J7  DNP  [U.FL]  171.96,42.42 90 top
J8  DNP  [U.FL]  230.38,42.42 90 top
J9  DNP  [U.FL]  55.12,68.83 90 top
J10  DNP  [U.FL]  113.54,68.83 90 top
J11  DNP  [U.FL]  171.96,68.83 90 top
J12  DNP  [U.FL]  230.38,68.83 90 top
J13  DNP  [U.FL]  55.12,95.25 90 top
J14  DNP  [U.FL]  113.54,95.25 90 top
J15  DNP  [U.FL]  171.96,95.25 90 top
J16  DNP  [U.FL]  230.38,95.25 90 top
J17  DNP  [U.FL]  55.12,121.67 90 top
J18  DNP  [U.FL]  113.54,121.67 90 top
J19  DNP  [U.FL]  171.96,121.67 90 top
J20  DNP  [U.FL]  230.38,121.67 90 top
JP1  [USB-B-MICRO-SMD_V03]  11.56,13.46 0 top
JP2  [1X10_NO_SILK]  25.91,8.38 0 top
JP3  [1X10_NO_SILK]  25.91,31.24 0 top
JP4  [JST-2-PTH]  15.37,23.62 90 top
JP5  [1X02_NO_SILK]  10.67,22.35 90 top
JP6  [SCREWTERMINAL-3.5MM-2-NS]  13.21,21.84 90 top
JP7  [USB-B-MICRO-SMD_V03]  69.98,13.46 0 top
JP8  [1X10_NO_SILK]  84.33,8.38 0 top
JP9  [1X10_NO_SILK]  84.33,31.24 0 top
JP10  [JST-2-PTH]  73.79,23.62 90 top
JP11  [1X02_NO_SILK]  69.09,22.35 90 top
JP12  [SCREWTERMINAL-3.5MM-2-NS]  71.63,21.84 90 top
JP13  [USB-B-MICRO-SMD_V03]  128.4,13.46 0 top
JP14  [1X10_NO_SILK]  142.75,8.38 0 top
JP15  [1X10_NO_SILK]  142.75,31.24 0 top
JP16  [JST-2-PTH]  132.21,23.62 90 top
JP17  [1X02_NO_SILK]  127.51,22.35 90 top
JP18  [SCREWTERMINAL-3.5MM-2-NS]  130.05,21.84 90 top
JP19  [USB-B-MICRO-SMD_V03]  186.82,13.46 0 top
JP20  [1X10_NO_SILK]  201.17,8.38 0 top
JP21  [1X10_NO_SILK]  201.17,31.24 0 top
JP22  [JST-2-PTH]  190.63,23.62 90 top
JP23  [1X02_NO_SILK]  185.93,22.35 90 top
JP24  [SCREWTERMINAL-3.5MM-2-NS]  188.47,21.84 90 top
JP25  [USB-B-MICRO-SMD_V03]  11.56,39.88 0 top
JP26  [1X10_NO_SILK]  25.91,34.8 0 top
JP27  [1X10_NO_SILK]  25.91,57.66 0 top
JP28  [JST-2-PTH]  15.37,50.04 90 top
JP29  [1X02_NO_SILK]  10.67,48.77 90 top
JP30  [SCREWTERMINAL-3.5MM-2-NS]  13.21,48.26 90 top
JP31  [USB-B-MICRO-SMD_V03]  69.98,39.88 0 top
JP32  [1X10_NO_SILK]  84.33,34.8 0 top
JP33  [1X10_NO_SILK]  84.33,57.66 0 top
JP34  [JST-2-PTH]  73.79,50.04 90 top
JP35  [1X02_NO_SILK]  69.09,48.77 90 top
JP36  [SCREWTERMINAL-3.5MM-2-NS]  71.63,48.26 90 top
JP37  [USB-B-MICRO-SMD_V03]  128.4,39.88 0 top
JP38  [1X10_NO_SILK]  142.75,34.8 0 top
JP39  [1X10_NO_SILK]  142.75,57.66 0 top
JP40  [JST-2-PTH]  132.21,50.04 90 top
JP41  [1X02_NO_SILK]  127.51,48.77 90 top
JP42  [SCREWTERMINAL-3.5MM-2-NS]  130.05,48.26 90 top
JP43  [USB-B-MICRO-SMD_V03]  186.82,39.88 0 top
JP44  [1X10_NO_SILK]  201.17,34.8 0 top
JP45  [1X10_NO_SILK]  201.17,57.66 0 top
JP46  [JST-2-PTH]  190.63,50.04 90 top
JP47  [1X02_NO_SILK]  185.93,48.77 90 top
JP48  [SCREWTERMINAL-3.5MM-2-NS]  188.47,48.26 90 top
JP49  [USB-B-MICRO-SMD_V03]  11.56,66.29 0 top
JP50  [1X10_NO_SILK]  25.91,61.21 0 top
JP51  [1X10_NO_SILK]  25.91,84.07 0 top
JP52  [JST-2-PTH]  15.37,76.45 90 top
JP53  [1X02_NO_SILK]  10.67,75.18 90 top
JP54  [SCREWTERMINAL-3.5MM-2-NS]  13.21,74.68 90 top
JP55  [USB-B-MICRO-SMD_V03]  69.98,66.29 0 top
JP56  [1X10_NO_SILK]  84.33,61.21 0 top
JP57  [1X10_NO_SILK]  84.33,84.07 0 top
JP58  [JST-2-PTH]  73.79,76.45 90 top
JP59  [1X02_NO_SILK]  69.09,75.18 90 top
JP60  [SCREWTERMINAL-3.5MM-2-NS]  71.63,74.68 90 top
JP61  [USB-B-MICRO-SMD_V03]  128.4,66.29 0 top
JP62  [1X10_NO_SILK]  142.75,61.21 0 top
JP63  [1X10_NO_SILK]  142.75,84.07 0 top
JP64  [JST-2-PTH]  132.21,76.45 90 top
JP65  [1X02_NO_SILK]  127.51,75.18 90 top
JP66  [SCREWTERMINAL-3.5MM-2-NS]  130.05,74.68 90 top
JP67  [USB-B-MICRO-SMD_V03]  186.82,66.29 0 top
JP68  [1X10_NO_SILK]  201.17,61.21 0 top
JP69  [1X10_NO_SILK]  201.17,84.07 0 top
JP70  [JST-2-PTH]  190.63,76.45 90 top
JP71  [1X02_NO_SILK]  185.93,75.18 90 top
JP72  [SCREWTERMINAL-3.5MM-2-NS]  188.47,74.68 90 top
JP73  [USB-B-MICRO-SMD_V03]  11.56,92.71 0 top
JP74  [1X10_NO_SILK]  25.91,87.63 0 top
JP75  [1X10_NO_SILK]  25.91,110.49 0 top
JP76  [JST-2-PTH]  15.37,102.87 90 top
JP77  [1X02_NO_SILK]  10.67,101.6 90 top
JP78  [SCREWTERMINAL-3.5MM-2-NS]  13.21,101.09 90 top
JP79  [USB-B-MICRO-SMD_V03]  69.98,92.71 0 top
JP80  [1X10_NO_SILK]  84.33,87.63 0 top
JP81  [1X10_NO_SILK]  84.33,110.49 0 top
JP82  [JST-2-PTH]  73.79,102.87 90 top
JP83  [1X02_NO_SILK]  69.09,101.6 90 top
JP84  [SCREWTERMINAL-3.5MM-2-NS]  71.63,101.09 90 top
JP85  [USB-B-MICRO-SMD_V03]  128.4,92.71 0 top
JP86  [1X10_NO_SILK]  142.75,87.63 0 top
JP87  [1X10_NO_SILK]  142.75,110.49 0 top
JP88  [JST-2-PTH]  132.21,102.87 90 top
JP89  [1X02_NO_SILK]  127.51,101.6 90 top
JP90  [SCREWTERMINAL-3.5MM-2-NS]  130.05,101.09 90 top
JP91  [USB-B-MICRO-SMD_V03]  186.82,92.71 0 top
JP92  [1X10_NO_SILK]  201.17,87.63 0 top
JP93  [1X10_NO_SILK]  201.17,110.49 0 top
JP94  [JST-2-PTH]  190.63,102.87 90 top
JP95  [1X02_NO_SILK]  185.93,101.6 90 top
JP96  [SCREWTERMINAL-3.5MM-2-NS]  188.47,101.09 90 top
JP97  [USB-B-MICRO-SMD_V03]  11.56,119.13 0 top
JP98  [1X10_NO_SILK]  25.91,114.05 0 top
JP99  [1X10_NO_SILK]  25.91,136.91 0 top
JP100  [JST-2-PTH]  15.37,129.29 90 top
JP101  [1X02_NO_SILK]  10.67,128.02 90 top
JP102  [SCREWTERMINAL-3.5MM-2-NS]  13.21,127.51 90 top
JP103  [USB-B-MICRO-SMD_V03]  69.98,119.13 0 top
JP104  [1X10_NO_SILK]  84.33,114.05 0 top
JP105  [1X10_NO_SILK]  84.33,136.91 0 top
JP106  [JST-2-PTH]  73.79,129.29 90 top
JP107  [1X02_NO_SILK]  69.09,128.02 90 top
JP108  [SCREWTERMINAL-3.5MM-2-NS]  71.63,127.51 90 top
JP109  [USB-B-MICRO-SMD_V03]  128.4,119.13 0 top
JP110  [1X10_NO_SILK]  142.75,114.05 0 top
JP111  [1X10_NO_SILK]  142.75,136.91 0 top
JP112  [JST-2-PTH]  132.21,129.29 90 top
JP113  [1X02_NO_SILK]  127.51,128.02 90 top
JP114  [SCREWTERMINAL-3.5MM-2-NS]  130.05,127.51 90 top
JP115  [USB-B-MICRO-SMD_V03]  186.82,119.13 0 top
JP116  [1X10_NO_SILK]  201.17,114.05 0 top
JP117  [1X10_NO_SILK]  201.17,136.91 0 top
JP118  [JST-2-PTH]  190.63,129.29 90 top
JP119  [1X02_NO_SILK]  185.93,128.02 90 top
JP120  [SCREWTERMINAL-3.5MM-2-NS]  188.47,127.51 90 top
L1  DNP  [0603]  48.77,20.21 270 top
L2  DNP  [0603]  53.34,20.64 270 top
L3  DNP  [0603]  107.19,20.21 270 top
L4  DNP  [0603]  111.76,20.64 270 top
L5  DNP  [0603]  165.61,20.21 270 top
L6  DNP  [0603]  170.18,20.64 270 top
L7  DNP  [0603]  224.03,20.21 270 top
L8  DNP  [0603]  228.6,20.64 270 top
L9  DNP  [0603]  48.77,46.62 270 top
L10  DNP  [0603]  53.34,47.05 270 top
L11  DNP  [0603]  107.19,46.62 270 top
L12  DNP  [0603]  111.76,47.05 270 top
L13  DNP  [0603]  165.61,46.62 270 top
L14  DNP  [0603]  170.18,47.05 270 top
L15  DNP  [0603]  224.03,46.62 270 top
L16  DNP  [0603]  228.6,47.05 270 top
L17  DNP  [0603]  48.77,73.04 270 top
L18  DNP  [0603]  53.34,73.47 270 top
L19  DNP  [0603]  107.19,73.04 270 top
L20  DNP  [0603]  111.76,73.47 270 top
L21  DNP  [0603]  165.61,73.04 270 top
L22  DNP  [0603]  170.18,73.47 270 top
L23  DNP  [0603]  224.03,73.04 270 top
L24  DNP  [0603]  228.6,73.47 270 top
L25  DNP  [0603]  48.77,99.45 270 top
L26  DNP  [0603]  53.34,99.89 270 top
L27  DNP  [0603]  107.19,99.45 270 top
L28  DNP  [0603]  111.76,99.89 270 top
L29  DNP  [0603]  165.61,99.45 270 top
L30  DNP  [0603]  170.18,99.89 270 top
L31  DNP  [0603]  224.03,99.45 270 top
L32  DNP  [0603]  228.6,99.89 270 top
L33  DNP  [0603]  48.77,125.87 270 top
L34  DNP  [0603]  53.34,126.3 270 top
L35  DNP  [0603]  107.19,125.87 270 top
L36  DNP  [0603]  111.76,126.3 270 top
L37  DNP  [0603]  165.61,125.87 270 top
L38  DNP  [0603]  170.18,126.3 270 top
L39  DNP  [0603]  224.03,125.87 270 top
L40  DNP  [0603]  228.6,126.3 270 top
LOGO1  SFE_LOGO_NAME.2_INCH  [SFE_LOGO_NAME_.2]  62.74,8.76 90 top
LOGO2  OSHW-LOGOS  [OSHW-LOGO-S]  16.89,8.89 0 top
LOGO3  SFE_LOGO_NAME.2_INCH  [SFE_LOGO_NAME_.2]  58.67,8.76 90 bottom
LOGO4  SFE_LOGO_NAME.2_INCH  [SFE_LOGO_NAME_.2]  121.16,8.76 90 top
LOGO5  OSHW-LOGOS  [OSHW-LOGO-S]  75.31,8.89 0 top
LOGO6  SFE_LOGO_NAME.2_INCH  [SFE_LOGO_NAME_.2]  117.09,8.76 90 bottom
LOGO7  SFE_LOGO_NAME.2_INCH  [SFE_LOGO_NAME_.2]  179.58,8.76 90 top
LOGO8  OSHW-LOGOS  [OSHW-LOGO-S]  133.73,8.89 0 top
LOGO9  SFE_LOGO_NAME.2_INCH  [SFE_LOGO_NAME_.2]  175.51,8.76 90 bottom
LOGO10  SFE_LOGO_NAME.2_INCH  [SFE_LOGO_NAME_.2]  238,8.76 90 top
LOGO11  OSHW-LOGOS  [OSHW-LOGO-S]  192.15,8.89 0 top
LOGO12  SFE_LOGO_NAME.2_INCH  [SFE_LOGO_NAME_.2]  233.93,8.76 90 bottom
LOGO13  SFE_LOGO_NAME.2_INCH  [SFE_LOGO_NAME_.2]  62.74,35.18 90 top
LOGO14  OSHW-LOGOS  [OSHW-LOGO-S]  16.89,35.31 0 top
LOGO15  SFE_LOGO_NAME.2_INCH  [SFE_LOGO_NAME_.2]  58.67,35.18 90 bottom
LOGO16  SFE_LOGO_NAME.2_INCH  [SFE_LOGO_NAME_.2]  121.16,35.18 90 top
LOGO17  OSHW-LOGOS  [OSHW-LOGO-S]  75.31,35.31 0 top
LOGO18  SFE_LOGO_NAME.2_INCH  [SFE_LOGO_NAME_.2]  117.09,35.18 90 bottom
LOGO19  SFE_LOGO_NAME.2_INCH  [SFE_LOGO_NAME_.2]  179.58,35.18 90 top
LOGO20  OSHW-LOGOS  [OSHW-LOGO-S]  133.73,35.31 0 top
LOGO21  SFE_LOGO_NAME.2_INCH  [SFE_LOGO_NAME_.2]  175.51,35.18 90 bottom
LOGO22  SFE_LOGO_NAME.2_INCH  [SFE_LOGO_NAME_.2]  238,35.18 90 top
LOGO23  OSHW-LOGOS  [OSHW-LOGO-S]  192.15,35.31 0 top
LOGO24  SFE_LOGO_NAME.2_INCH  [SFE_LOGO_NAME_.2]  233.93,35.18 90 bottom
LOGO25  SFE_LOGO_NAME.2_INCH  [SFE_LOGO_NAME_.2]  62.74,61.59 90 top
LOGO26  OSHW-LOGOS  [OSHW-LOGO-S]  16.89,61.72 0 top
LOGO27  SFE_LOGO_NAME.2_INCH  [SFE_LOGO_NAME_.2]  58.67,61.59 90 bottom
LOGO28  SFE_LOGO_NAME.2_INCH  [SFE_LOGO_NAME_.2]  121.16,61.59 90 top
LOGO29  OSHW-LOGOS  [OSHW-LOGO-S]  75.31,61.72 0 top
LOGO30  SFE_LOGO_NAME.2_INCH  [SFE_LOGO_NAME_.2]  117.09,61.59 90 bottom
LOGO31  SFE_LOGO_NAME.2_INCH  [SFE_LOGO_NAME_.2]  179.58,61.59 90 top
LOGO32  OSHW-LOGOS  [OSHW-LOGO-S]  133.73,61.72 0 top
LOGO33  SFE_LOGO_NAME.2_INCH  [SFE_LOGO_NAME_.2]  175.51,61.59 90 bottom
LOGO34  SFE_LOGO_NAME.2_INCH  [SFE_LOGO_NAME_.2]  238,61.59 90 top
LOGO35  OSHW-LOGOS  [OSHW-LOGO-S]  192.15,61.72 0 top
LOGO36  SFE_LOGO_NAME.2_INCH  [SFE_LOGO_NAME_.2]  233.93,61.59 90 bottom
LOGO37  SFE_LOGO_NAME.2_INCH  [SFE_LOGO_NAME_.2]  62.74,88.01 90 top
LOGO38  OSHW-LOGOS  [OSHW-LOGO-S]  16.89,88.14 0 top
LOGO39  SFE_LOGO_NAME.2_INCH  [SFE_LOGO_NAME_.2]  58.67,88.01 90 bottom
LOGO40  SFE_LOGO_NAME.2_INCH  [SFE_LOGO_NAME_.2]  121.16,88.01 90 top
LOGO41  OSHW-LOGOS  [OSHW-LOGO-S]  75.31,88.14 0 top
LOGO42  SFE_LOGO_NAME.2_INCH  [SFE_LOGO_NAME_.2]  117.09,88.01 90 bottom
LOGO43  SFE_LOGO_NAME.2_INCH  [SFE_LOGO_NAME_.2]  179.58,88.01 90 top
LOGO44  OSHW-LOGOS  [OSHW-LOGO-S]  133.73,88.14 0 top
LOGO45  SFE_LOGO_NAME.2_INCH  [SFE_LOGO_NAME_.2]  175.51,88.01 90 bottom
LOGO46  SFE_LOGO_NAME.2_INCH  [SFE_LOGO_NAME_.2]  238,88.01 90 top
LOGO47  OSHW-LOGOS  [OSHW-LOGO-S]  192.15,88.14 0 top
LOGO48  SFE_LOGO_NAME.2_INCH  [SFE_LOGO_NAME_.2]  233.93,88.01 90 bottom
LOGO49  SFE_LOGO_NAME.2_INCH  [SFE_LOGO_NAME_.2]  62.74,114.43 90 top
LOGO50  OSHW-LOGOS  [OSHW-LOGO-S]  16.89,114.55 0 top
LOGO51  SFE_LOGO_NAME.2_INCH  [SFE_LOGO_NAME_.2]  58.67,114.43 90 bottom
LOGO52  SFE_LOGO_NAME.2_INCH  [SFE_LOGO_NAME_.2]  121.16,114.43 90 top
LOGO53  OSHW-LOGOS  [OSHW-LOGO-S]  75.31,114.55 0 top
LOGO54  SFE_LOGO_NAME.2_INCH  [SFE_LOGO_NAME_.2]  117.09,114.43 90 bottom
LOGO55  SFE_LOGO_NAME.2_INCH  [SFE_LOGO_NAME_.2]  179.58,114.43 90 top
LOGO56  OSHW-LOGOS  [OSHW-LOGO-S]  133.73,114.55 0 top
LOGO57  SFE_LOGO_NAME.2_INCH  [SFE_LOGO_NAME_.2]  175.51,114.43 90 bottom
LOGO58  SFE_LOGO_NAME.2_INCH  [SFE_LOGO_NAME_.2]  238,114.43 90 top
LOGO59  OSHW-LOGOS  [OSHW-LOGO-S]  192.15,114.55 0 top
LOGO60  SFE_LOGO_NAME.2_INCH  [SFE_LOGO_NAME_.2]  233.93,114.43 90 bottom
Q1  MMBT2222A  [SOT23-3]  34.8,14.1 180 top
Q2  MMBT2222A  [SOT23-3]  34.8,17.91 0 top
Q3  MMBT2222A  [SOT23-3]  93.22,14.1 180 top
Q4  MMBT2222A  [SOT23-3]  93.22,17.91 0 top
Q5  MMBT2222A  [SOT23-3]  151.64,14.1 180 top
Q6  MMBT2222A  [SOT23-3]  151.64,17.91 0 top
Q7  MMBT2222A  [SOT23-3]  210.06,14.1 180 top
Q8  MMBT2222A  [SOT23-3]  210.06,17.91 0 top
Q9  MMBT2222A  [SOT23-3]  34.8,40.51 180 top
Q10  MMBT2222A  [SOT23-3]  34.8,44.32 0 top
Q11  MMBT2222A  [SOT23-3]  93.22,40.51 180 top
Q12  MMBT2222A  [SOT23-3]  93.22,44.32 0 top
Q13  MMBT2222A  [SOT23-3]  151.64,40.51 180 top
Q14  MMBT2222A  [SOT23-3]  151.64,44.32 0 top
Q15  MMBT2222A  [SOT23-3]  210.06,40.51 180 top
Q16  MMBT2222A  [SOT23-3]  210.06,44.32 0 top
Q17  MMBT2222A  [SOT23-3]  34.8,66.93 180 top
Q18  MMBT2222A  [SOT23-3]  34.8,70.74 0 top
Q19  MMBT2222A  [SOT23-3]  93.22,66.93 180 top
Q20  MMBT2222A  [SOT23-3]  93.22,70.74 0 top
Q21  MMBT2222A  [SOT23-3]  151.64,66.93 180 top
Q22  MMBT2222A  [SOT23-3]  151.64,70.74 0 top
Q23  MMBT2222A  [SOT23-3]  210.06,66.93 180 top
Q24  MMBT2222A  [SOT23-3]  210.06,70.74 0 top
Q25  MMBT2222A  [SOT23-3]  34.8,93.34 180 top
Q26  MMBT2222A  [SOT23-3]  34.8,97.16 0 top
Q27  MMBT2222A  [SOT23-3]  93.22,93.34 180 top
Q28  MMBT2222A  [SOT23-3]  93.22,97.16 0 top
Q29  MMBT2222A  [SOT23-3]  151.64,93.34 180 top
Q30  MMBT2222A  [SOT23-3]  151.64,97.16 0 top
Q31  MMBT2222A  [SOT23-3]  210.06,93.34 180 top
Q32  MMBT2222A  [SOT23-3]  210.06,97.16 0 top
Q33  MMBT2222A  [SOT23-3]  34.8,119.76 180 top
Q34  MMBT2222A  [SOT23-3]  34.8,123.57 0 top
Q35  MMBT2222A  [SOT23-3]  93.22,119.76 180 top
Q36  MMBT2222A  [SOT23-3]  93.22,123.57 0 top
Q37  MMBT2222A  [SOT23-3]  151.64,119.76 180 top
Q38  MMBT2222A  [SOT23-3]  151.64,123.57 0 top
Q39  MMBT2222A  [SOT23-3]  210.06,119.76 180 top
Q40  MMBT2222A  [SOT23-3]  210.06,123.57 0 top
R1  12k  [0603-RES]  46.23,16 90 top
R2  10K  [0603-RES]  50.04,24.26 270 top
R3  200  [0603-RES]  28.45,26.16 0 top
R4  200  [0603-RES]  35.43,27.43 90 top
R5  10K  [0603-RES]  47.5,16 270 top
R6  200  [0603-RES]  28.45,27.43 180 top
R7  27  [0603-RES]  17.53,14.43 0 top
R8  27  [0603-RES]  17.53,13.16 0 top
R9  10K  [0603-RES]  37.34,16 270 top
R10  10K  [0603-RES]  32.26,16 90 top
R11  10K  [0603-RES]  32.26,12.19 90 top
R12  1K  [0603-RES]  39.88,12.19 90 top
R13  1K  [0603-RES]  37.34,12.19 270 top
R14  10K  [0603-RES]  34.16,27.43 90 top
R15  1K  [0603-RES]  28.45,24.89 180 top
R16  1K  [0603-RES]  28.45,23.62 180 top
R17  10K  [0603-RES]  48.77,27.43 90 top
R18  12k  [0603-RES]  104.65,16 90 top
R19  1K  [0603-RES]  95.76,12.19 270 top
R20  27  [0603-RES]  75.95,14.43 0 top
R21  27  [0603-RES]  75.95,13.16 0 top
R22  200  [0603-RES]  86.87,26.16 0 top
R23  1K  [0603-RES]  86.87,23.62 180 top
R24  10K  [0603-RES]  108.46,24.26 270 top
R25  200  [0603-RES]  93.85,27.43 90 top
R26  10K  [0603-RES]  105.92,16 270 top
R27  200  [0603-RES]  86.87,27.43 180 top
R28  1K  [0603-RES]  86.87,24.89 180 top
R29  10K  [0603-RES]  107.19,27.43 90 top
R30  1K  [0603-RES]  98.3,12.19 90 top
R31  10K  [0603-RES]  92.58,27.43 90 top
R32  10K  [0603-RES]  90.68,12.19 90 top
R33  10K  [0603-RES]  95.76,16 270 top
R34  10K  [0603-RES]  90.68,16 90 top
R35  12k  [0603-RES]  163.07,16 90 top
R36  1K  [0603-RES]  154.18,12.19 270 top
R37  27  [0603-RES]  134.37,14.43 0 top
R38  27  [0603-RES]  134.37,13.16 0 top
R39  200  [0603-RES]  145.29,26.16 0 top
R40  1K  [0603-RES]  145.29,23.62 180 top
R41  10K  [0603-RES]  166.88,24.26 270 top
R42  200  [0603-RES]  152.27,27.43 90 top
R43  10K  [0603-RES]  164.34,16 270 top
R44  200  [0603-RES]  145.29,27.43 180 top
R45  1K  [0603-RES]  145.29,24.89 180 top
R46  10K  [0603-RES]  165.61,27.43 90 top
R47  1K  [0603-RES]  156.72,12.19 90 top
R48  10K  [0603-RES]  151,27.43 90 top
R49  10K  [0603-RES]  149.1,12.19 90 top
R50  10K  [0603-RES]  154.18,16 270 top
R51  10K  [0603-RES]  149.1,16 90 top
R52  12k  [0603-RES]  221.49,16 90 top
R53  1K  [0603-RES]  212.6,12.19 270 top
R54  27  [0603-RES]  192.79,14.43 0 top
R55  27  [0603-RES]  192.79,13.16 0 top
R56  200  [0603-RES]  203.71,26.16 0 top
R57  1K  [0603-RES]  203.71,23.62 180 top
R58  10K  [0603-RES]  225.3,24.26 270 top
R59  200  [0603-RES]  210.69,27.43 90 top
R60  10K  [0603-RES]  222.76,16 270 top
R61  200  [0603-RES]  203.71,27.43 180 top
R62  1K  [0603-RES]  203.71,24.89 180 top
R63  10K  [0603-RES]  224.03,27.43 90 top
R64  1K  [0603-RES]  215.14,12.19 90 top
R65  10K  [0603-RES]  209.42,27.43 90 top
R66  10K  [0603-RES]  207.52,12.19 90 top
R67  10K  [0603-RES]  212.6,16 270 top
R68  10K  [0603-RES]  207.52,16 90 top
R69  12k  [0603-RES]  46.23,42.42 90 top
R70  1K  [0603-RES]  37.34,38.61 270 top
R71  27  [0603-RES]  17.53,40.84 0 top
R72  27  [0603-RES]  17.53,39.57 0 top
R73  200  [0603-RES]  28.45,52.58 0 top
R74  1K  [0603-RES]  28.45,50.04 180 top
R75  10K  [0603-RES]  50.04,50.67 270 top
R76  200  [0603-RES]  35.43,53.85 90 top
R77  10K  [0603-RES]  47.5,42.42 270 top
R78  200  [0603-RES]  28.45,53.85 180 top
R79  1K  [0603-RES]  28.45,51.31 180 top
R80  10K  [0603-RES]  48.77,53.85 90 top
R81  1K  [0603-RES]  39.88,38.61 90 top
R82  10K  [0603-RES]  34.16,53.85 90 top
R83  10K  [0603-RES]  32.26,38.61 90 top
R84  10K  [0603-RES]  37.34,42.42 270 top
R85  10K  [0603-RES]  32.26,42.42 90 top
R86  12k  [0603-RES]  104.65,42.42 90 top
R87  1K  [0603-RES]  95.76,38.61 270 top
R88  27  [0603-RES]  75.95,40.84 0 top
R89  27  [0603-RES]  75.95,39.57 0 top
R90  200  [0603-RES]  86.87,52.58 0 top
R91  1K  [0603-RES]  86.87,50.04 180 top
R92  10K  [0603-RES]  108.46,50.67 270 top
R93  200  [0603-RES]  93.85,53.85 90 top
R94  10K  [0603-RES]  105.92,42.42 270 top
R95  200  [0603-RES]  86.87,53.85 180 top
R96  1K  [0603-RES]  86.87,51.31 180 top
R97  10K  [0603-RES]  107.19,53.85 90 top
R98  1K  [0603-RES]  98.3,38.61 90 top
R99  10K  [0603-RES]  92.58,53.85 90 top
R100  10K  [0603-RES]  90.68,38.61 90 top
R101  10K  [0603-RES]  95.76,42.42 270 top
R102  10K  [0603-RES]  90.68,42.42 90 top
R103  12k  [0603-RES]  163.07,42.42 90 top
R104  1K  [0603-RES]  154.18,38.61 270 top
R105  27  [0603-RES]  134.37,40.84 0 top
R106  27  [0603-RES]  134.37,39.57 0 top
R107  200  [0603-RES]  145.29,52.58 0 top
R108  1K  [0603-RES]  145.29,50.04 180 top
R109  10K  [0603-RES]  166.88,50.67 270 top
R110  200  [0603-RES]  152.27,53.85 90 top
R111  10K  [0603-RES]  164.34,42.42 270 top
R112  200  [0603-RES]  145.29,53.85 180 top
R113  1K  [0603-RES]  145.29,51.31 180 top
R114  10K  [0603-RES]  165.61,53.85 90 top
R115  1K  [0603-RES]  156.72,38.61 90 top
R116  10K  [0603-RES]  151,53.85 90 top
R117  10K  [0603-RES]  149.1,38.61 90 top
R118  10K  [0603-RES]  154.18,42.42 270 top
R119  10K  [0603-RES]  149.1,42.42 90 top
R120  12k  [0603-RES]  221.49,42.42 90 top
R121  1K  [0603-RES]  212.6,38.61 270 top
R122  27  [0603-RES]  192.79,40.84 0 top
R123  27  [0603-RES]  192.79,39.57 0 top
R124  200  [0603-RES]  203.71,52.58 0 top
R125  1K  [0603-RES]  203.71,50.04 180 top
R126  10K  [0603-RES]  225.3,50.67 270 top
R127  200  [0603-RES]  210.69,53.85 90 top
R128  10K  [0603-RES]  222.76,42.42 270 top
R129  200  [0603-RES]  203.71,53.85 180 top
R130  1K  [0603-RES]  203.71,51.31 180 top
R131  10K  [0603-RES]  224.03,53.85 90 top
R132  1K  [0603-RES]  215.14,38.61 90 top
R133  10K  [0603-RES]  209.42,53.85 90 top
R134  10K  [0603-RES]  207.52,38.61 90 top
R135  10K  [0603-RES]  212.6,42.42 270 top
R136  10K  [0603-RES]  207.52,42.42 90 top
R137  12k  [0603-RES]  46.23,68.83 90 top
R138  1K  [0603-RES]  37.34,65.02 270 top
R139  27  [0603-RES]  17.53,67.26 0 top
R140  27  [0603-RES]  17.53,65.99 0 top
R141  200  [0603-RES]  28.45,78.99 0 top
R142  1K  [0603-RES]  28.45,76.45 180 top
R143  10K  [0603-RES]  50.04,77.09 270 top
R144  200  [0603-RES]  35.43,80.26 90 top
R145  10K  [0603-RES]  47.5,68.83 270 top
R146  200  [0603-RES]  28.45,80.26 180 top
R147  1K  [0603-RES]  28.45,77.72 180 top
R148  10K  [0603-RES]  48.77,80.26 90 top
R149  1K  [0603-RES]  39.88,65.02 90 top
R150  10K  [0603-RES]  34.16,80.26 90 top
R151  10K  [0603-RES]  32.26,65.02 90 top
R152  10K  [0603-RES]  37.34,68.83 270 top
R153  10K  [0603-RES]  32.26,68.83 90 top
R154  12k  [0603-RES]  104.65,68.83 90 top
R155  1K  [0603-RES]  95.76,65.02 270 top
R156  27  [0603-RES]  75.95,67.26 0 top
R157  27  [0603-RES]  75.95,65.99 0 top
R158  200  [0603-RES]  86.87,78.99 0 top
R159  1K  [0603-RES]  86.87,76.45 180 top
R160  10K  [0603-RES]  108.46,77.09 270 top
R161  200  [0603-RES]  93.85,80.26 90 top
R162  10K  [0603-RES]  105.92,68.83 270 top
R163  200  [0603-RES]  86.87,80.26 180 top
R164  1K  [0603-RES]  86.87,77.72 180 top
R165  10K  [0603-RES]  107.19,80.26 90 top
R166  1K  [0603-RES]  98.3,65.02 90 top
R167  10K  [0603-RES]  92.58,80.26 90 top
R168  10K  [0603-RES]  90.68,65.02 90 top
R169  10K  [0603-RES]  95.76,68.83 270 top
R170  10K  [0603-RES]  90.68,68.83 90 top
R171  12k  [0603-RES]  163.07,68.83 90 top
R172  1K  [0603-RES]  154.18,65.02 270 top
R173  27  [0603-RES]  134.37,67.26 0 top
R174  27  [0603-RES]  134.37,65.99 0 top
R175  200  [0603-RES]  145.29,78.99 0 top
R176  1K  [0603-RES]  145.29,76.45 180 top
R177  10K  [0603-RES]  166.88,77.09 270 top
R178  200  [0603-RES]  152.27,80.26 90 top
R179  10K  [0603-RES]  164.34,68.83 270 top
R180  200  [0603-RES]  145.29,80.26 180 top
R181  1K  [0603-RES]  145.29,77.72 180 top
R182  10K  [0603-RES]  165.61,80.26 90 top
R183  1K  [0603-RES]  156.72,65.02 90 top
R184  10K  [0603-RES]  151,80.26 90 top
R185  10K  [0603-RES]  149.1,65.02 90 top
R186  10K  [0603-RES]  154.18,68.83 270 top
R187  10K  [0603-RES]  149.1,68.83 90 top
R188  12k  [0603-RES]  221.49,68.83 90 top
R189  1K  [0603-RES]  212.6,65.02 270 top
R190  27  [0603-RES]  192.79,67.26 0 top
R191  27  [0603-RES]  192.79,65.99 0 top
R192  200  [0603-RES]  203.71,78.99 0 top
R193  1K  [0603-RES]  203.71,76.45 180 top
R194  10K  [0603-RES]  225.3,77.09 270 top
R195  200  [0603-RES]  210.69,80.26 90 top
R196  10K  [0603-RES]  222.76,68.83 270 top
R197  200  [0603-RES]  203.71,80.26 180 top
R198  1K  [0603-RES]  203.71,77.72 180 top
R199  10K  [0603-RES]  224.03,80.26 90 top
R200  1K  [0603-RES]  215.14,65.02 90 top
R201  10K  [0603-RES]  209.42,80.26 90 top
R202  10K  [0603-RES]  207.52,65.02 90 top
R203  10K  [0603-RES]  212.6,68.83 270 top
R204  10K  [0603-RES]  207.52,68.83 90 top
R205  12k  [0603-RES]  46.23,95.25 90 top
R206  1K  [0603-RES]  37.34,91.44 270 top
R207  27  [0603-RES]  17.53,93.68 0 top
R208  27  [0603-RES]  17.53,92.41 0 top
R209  200  [0603-RES]  28.45,105.41 0 top
R210  1K  [0603-RES]  28.45,102.87 180 top
R211  10K  [0603-RES]  50.04,103.5 270 top
R212  200  [0603-RES]  35.43,106.68 90 top
R213  10K  [0603-RES]  47.5,95.25 270 top
R214  200  [0603-RES]  28.45,106.68 180 top
R215  1K  [0603-RES]  28.45,104.14 180 top
R216  10K  [0603-RES]  48.77,106.68 90 top
R217  1K  [0603-RES]  39.88,91.44 90 top
R218  10K  [0603-RES]  34.16,106.68 90 top
R219  10K  [0603-RES]  32.26,91.44 90 top
R220  10K  [0603-RES]  37.34,95.25 270 top
R221  10K  [0603-RES]  32.26,95.25 90 top
R222  12k  [0603-RES]  104.65,95.25 90 top
R223  1K  [0603-RES]  95.76,91.44 270 top
R224  27  [0603-RES]  75.95,93.68 0 top
R225  27  [0603-RES]  75.95,92.41 0 top
R226  200  [0603-RES]  86.87,105.41 0 top
R227  1K  [0603-RES]  86.87,102.87 180 top
R228  10K  [0603-RES]  108.46,103.5 270 top
R229  200  [0603-RES]  93.85,106.68 90 top
R230  10K  [0603-RES]  105.92,95.25 270 top
R231  200  [0603-RES]  86.87,106.68 180 top
R232  1K  [0603-RES]  86.87,104.14 180 top
R233  10K  [0603-RES]  107.19,106.68 90 top
R234  1K  [0603-RES]  98.3,91.44 90 top
R235  10K  [0603-RES]  92.58,106.68 90 top
R236  10K  [0603-RES]  90.68,91.44 90 top
R237  10K  [0603-RES]  95.76,95.25 270 top
R238  10K  [0603-RES]  90.68,95.25 90 top
R239  12k  [0603-RES]  163.07,95.25 90 top
R240  1K  [0603-RES]  154.18,91.44 270 top
R241  27  [0603-RES]  134.37,93.68 0 top
R242  27  [0603-RES]  134.37,92.41 0 top
R243  200  [0603-RES]  145.29,105.41 0 top
R244  1K  [0603-RES]  145.29,102.87 180 top
R245  10K  [0603-RES]  166.88,103.5 270 top
R246  200  [0603-RES]  152.27,106.68 90 top
R247  10K  [0603-RES]  164.34,95.25 270 top
R248  200  [0603-RES]  145.29,106.68 180 top
R249  1K  [0603-RES]  145.29,104.14 180 top
R250  10K  [0603-RES]  165.61,106.68 90 top
R251  1K  [0603-RES]  156.72,91.44 90 top
R252  10K  [0603-RES]  151,106.68 90 top
R253  10K  [0603-RES]  149.1,91.44 90 top
R254  10K  [0603-RES]  154.18,95.25 270 top
R255  10K  [0603-RES]  149.1,95.25 90 top
R256  12k  [0603-RES]  221.49,95.25 90 top
R257  1K  [0603-RES]  212.6,91.44 270 top
R258  27  [0603-RES]  192.79,93.68 0 top
R259  27  [0603-RES]  192.79,92.41 0 top
R260  200  [0603-RES]  203.71,105.41 0 top
R261  1K  [0603-RES]  203.71,102.87 180 top
R262  10K  [0603-RES]  225.3,103.5 270 top
R263  200  [0603-RES]  210.69,106.68 90 top
R264  10K  [0603-RES]  222.76,95.25 270 top
R265  200  [0603-RES]  203.71,106.68 180 top
R266  1K  [0603-RES]  203.71,104.14 180 top
R267  10K  [0603-RES]  224.03,106.68 90 top
R268  1K  [0603-RES]  215.14,91.44 90 top
R269  10K  [0603-RES]  209.42,106.68 90 top
R270  10K  [0603-RES]  207.52,91.44 90 top
R271  10K  [0603-RES]  212.6,95.25 270 top
R272  10K  [0603-RES]  207.52,95.25 90 top
R273  12k  [0603-RES]  46.23,121.67 90 top
R274  1K  [0603-RES]  37.34,117.86 270 top
R275  27  [0603-RES]  17.53,120.09 0 top
R276  27  [0603-RES]  17.53,118.82 0 top
R277  200  [0603-RES]  28.45,131.83 0 top
R278  1K  [0603-RES]  28.45,129.29 180 top